# EAGLE board spi_lcd (EAGLE 6.1)
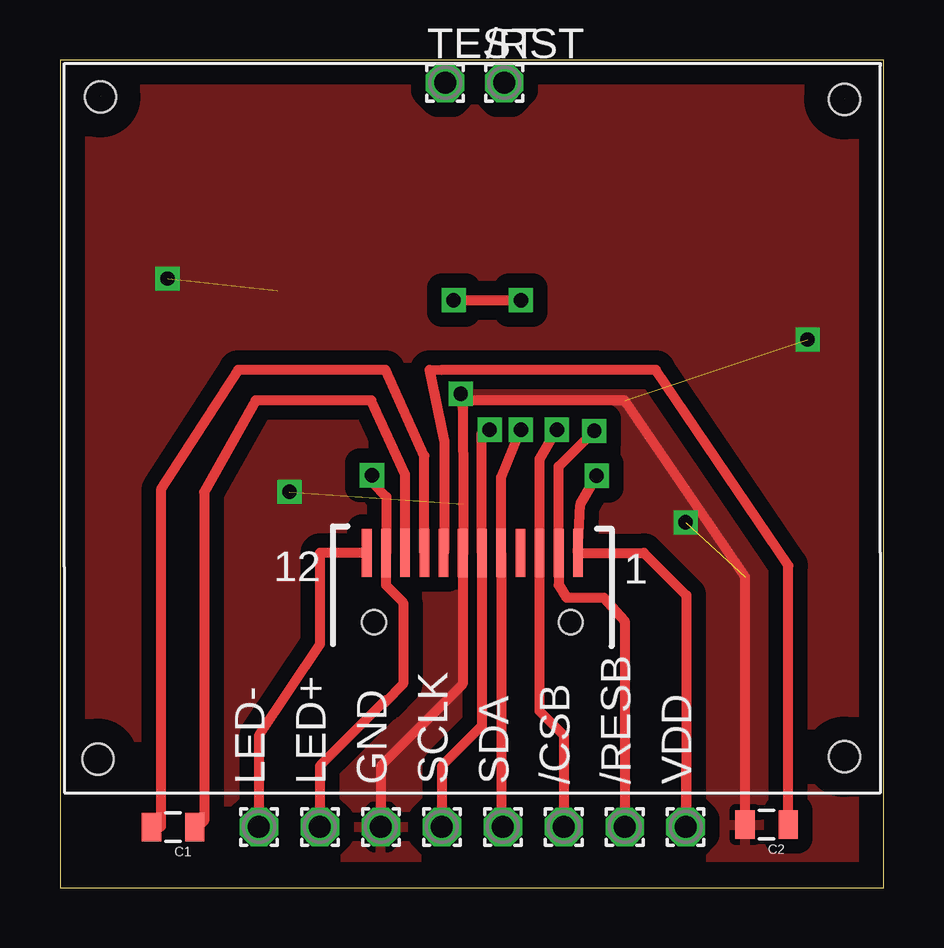
[diagram p0: board, top side]
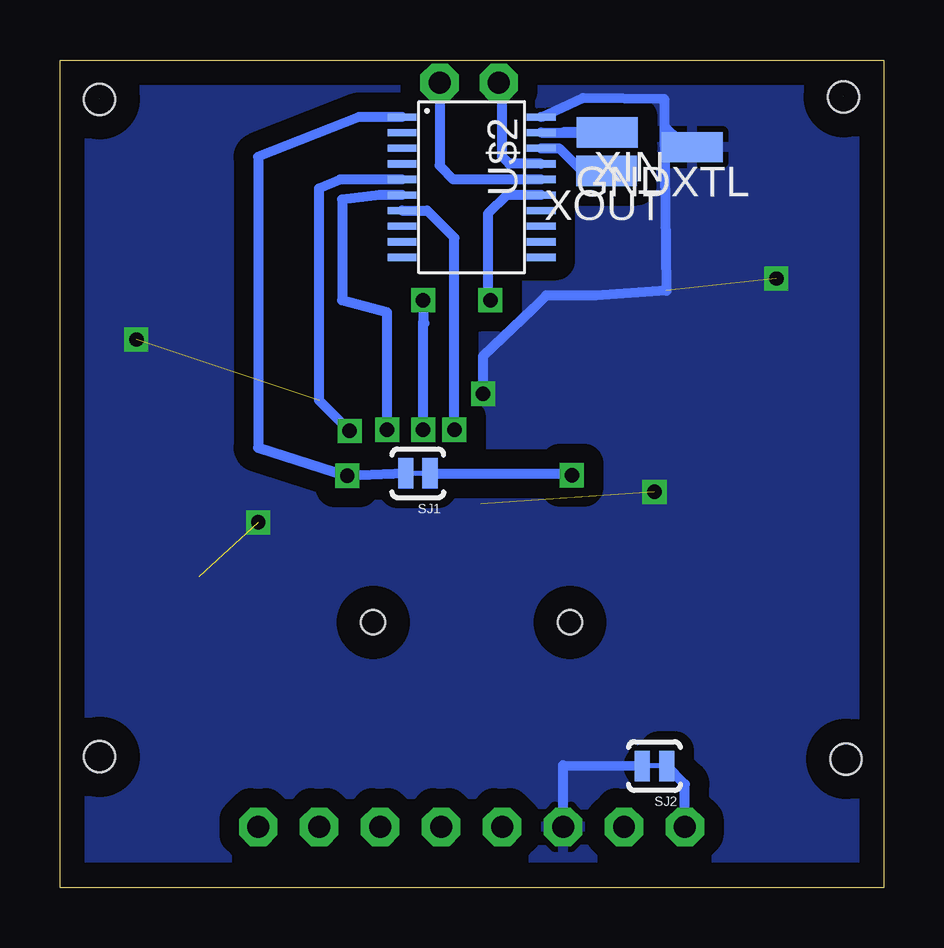
[diagram p1: board, bottom side, seen from below]

Size 34.33 x 34.52 mm. Coordinates in mm from the lower left corner, seen from the top.
Outline: 0,0 34.33,0 34.33,34.52 0,34.52 0,0
Copper layers (1*16): Top 0.035mm / dielectric 1.5mm / Bottom 0.035mm
Design rules: minimum track width 10mil, minimum drill 24mil, track to track 8mil, track to pad 8mil, pad to pad 8mil, via to via 8mil, smd to smd 8mil, copper to edge 40mil, drill to drill 8mil, minimum pad ring 10mil, minimum via ring 8mil, stop-mask expansion 4mil, vias tented up to drill 0mil, thermal gap 10mil
Holes 2.2 mm at -5.68,1.91 38.77,1.91

## Footprints (pad centres in the part's own frame; a part is rotated, then mirrored left to right if it is on the bottom)
1,6/0,9 = drill 0.914 pad 1.6 octagon: 1 0,0
0805 = smd 0.8 x 1.2: 1 -0.9,0; 2 0.9,0
SMD1,27-2,54 = smd 1.27 x 2.54: 1 0,0
SJ_2S-TRACE = smd 0.635 x 1.27: 1 -0.508,0; 2 0.508,0
PE9665WRF = smd 0.4 x 2: 1 4.4,0; 2 3.6,0; 3 2.8,0; 4 2,0; 5 1.2,0; 6 0.4,0; 7 -0.4,0; 8 -1.2,0; 9 -2,0; 10 -2.8,0; 11 -3.6,0; 12 -4.4,0 | hole 1: -4.1,-2.9; 4.1,-2.9 | hole 1.3: -15.5,19; 15.5,18.9; 15.5,-8.5; -15.6,-8.6
PW20 = smd 0.3 x 1.2: 1 -2.925,-2.9; 2 -2.275,-2.9; 3 -1.625,-2.9; 4 -0.975,-2.9; 5 -0.325,-2.9; 6 0.325,-2.9; 7 0.975,-2.9; 8 1.625,-2.9; 9 2.275,-2.9; 10 2.925,-2.9; 11 2.925,2.9; 12 2.275,2.9; 13 1.625,2.9; 14 0.975,2.9; 15 0.325,2.9; 16 -0.325,2.9; 17 -0.975,2.9; 18 -1.625,2.9; 19 -2.275,2.9; 20 -2.925,2.9

## Placement (x,y rotation side)
/CSB  [1,6/0,9]  20.99,2.54 0 top
/RESB  [1,6/0,9]  23.53,2.54 0 top
/RST  [1,6/0,9]  18.51,33.56 0 top
C1  [0805]  4.72,2.54 180 top
C2  [0805]  29.45,2.64 180 top
GND  [1,6/0,9]  13.37,2.54 0 top
GNDXTL  [SMD1,27-2,54]  7.99,30.88 90 bottom
LED+  [1,6/0,9]  10.83,2.54 0 top
LED-  [1,6/0,9]  8.29,2.54 0 top
SCLK  [1,6/0,9]  15.91,2.54 0 top
SDA  [1,6/0,9]  18.45,2.54 0 top
SJ1  SOLDERJUMPERTRACE  [SJ_2S-TRACE]  19.42,17.28 180 bottom
SJ2  SOLDERJUMPERTRACE  [SJ_2S-TRACE]  9.56,5.08 180 bottom
TEST  [1,6/0,9]  16.05,33.56 0 top
U$1  PE9665WRFPE9665WRF-WHOLE  [PE9665WRF]  17.18,13.97 0 top
U$2  G2XX3---PW20  [PW20]  17.18,29.21 270 bottom
VDD  [1,6/0,9]  26.07,2.54 0 top
XIN  [SMD1,27-2,54]  11.52,31.5 90 bottom
XOUT  [SMD1,27-2,54]  11.56,29.9 90 bottom

## Library data of the parts
/CSB /RESB /RST GND GNDXTL LED+ LED- SCLK SDA TEST VDD XIN XOUT = wirepad
C1 C2 SJ1 SJ2 = SparkFun-Passives
U$1 = apus-spidisplay
U$2 = TI_MSP430_v16

## Nets
C2: C2.1 U$1.8
GND: C2.2 GND.1 GNDXTL.1 SJ2.2 U$1.7 U$2.20
N$1: C1.1 U$1.10
N$2: C1.2 U$1.9
N$3: U$2.19 XIN.1
N$4: LED+.1 SJ1.1 U$1.11
N$5: LED-.1 SJ2.1 U$1.12
N$6: U$2.18 XOUT.1
N$7: SCLK.1 U$1.6 U$2.7
N$8: SDA.1 U$1.5 U$2.15
N$9: /CSB.1 U$1.3 U$2.6
N$10: /RESB.1 U$1.2 U$2.5
N$11: TEST.1 U$2.17
N$12: /RST.1 U$2.16
N$13: U$2.2
VDD: SJ1.2 U$1.1 U$2.1 VDD.1

## Tracks (layer width: path | path; a pad name or v marks a point on that pad's centre or on a via)
C2
  Top 0.406: C2.1 30.34,13.44 24.83,21.59 15.91,21.59 15.4,21.6 16,18.7 16.01,18.69 16.01,14.04 U$1.8
GND  (via drill 0.6)  (4 unrouted)
  Top 0.406: GND.1 13.37,5.08 16.78,8.49 U$1.7 16.81,14 16.8,13.9 16.8,16 16.78,20.32 | C2.2 28.54,12.96 23.53,20.32 16.78,20.32 | 16.78,20.32 v16.7,20.6
  Bottom 0.406: GND.1 13.37,5.12 SJ2.2 | v16.7,20.6 16.7,22.17 14.64,24.13 14.07,24.7 12,24.7 9.06,24.9 9.15,31.75 | U$2.20 12.54,32.94 9.16,32.9 9.15,31.75 | GNDXTL.1 8.49,31.1 9.15,31.75
  other vias: 26.07,15.24 4.48,25.4 9.56,16.51 31.15,22.86
  pour Top (isolate 0.61): 0.67,34.29 33.69,34.29 33.69,1.27 0.67,1.27
  pour Bottom (isolate 0.813): 0.67,34.29 33.69,34.29 33.69,1.27 0.67,1.27
N$1
  Top 0.406: U$1.10 14.38,17.24 12.97,20.32 8.15,20.32 6,16.5 6,2.79 5.75,2.54 C1.1
N$2
  Top 0.406: U$1.9 15.18,18.01 13.57,21.59 7.42,21.59 4.2,16.6 4.2,2.56 C1.2
N$3
  Bottom 0.406: U$2.19 13.37,31.48 | 13.37,31.48 10.83,31.48 10.83,31.75 | XIN.1 13.37,31.5 13.37,31.48
N$4  (via drill 0.6)
  Top 0.406: 13.58,7.83 13.47,7.72 | 13.47,7.72 10.83,5.08 LED+.1 | 13.47,7.72 13.5,7.7 14.3,8.5 14.3,11.9 13.58,12.62 U$1.11 13.6,13.99 13.6,16.3 13,16.9 v13,17.2
  Bottom 0.406: SJ1.1 13.08,17.28 v13,17.2
N$5
  Top 0.406: U$1.12 10.83,13.97 10.83,10.16 8.29,6.35 LED-.1
  Bottom 0.406: LED-.1 8.29,4.32 SJ2.1
N$6
  Bottom 0.406: U$2.18 13.54,30.84 12.6,29.9 XOUT.1
N$7  (via drill 0.6)
  Top 0.406: SCLK.1 15.91,5.08 17.58,6.75 U$1.6 17.58,18.98 v17.9,19.1
  Bottom 0.406: v17.9,19.1 17.9,27.1 19.04,28.23 U$2.7
N$8  (via drill 0.6)
  Top 0.406: SDA.1 18.38,2.61 U$1.5 18.38,17.11 v19.2,19.1 | v16.4,24.5 v19.2,24.5
  Bottom 0.406: v19.2,19.1 19.2,23.58 | 19.2,23.58 19.15,23.53 | U$2.15 15.72,28.89 16.5,28.1 16.5,24.6 v16.4,24.5 | v19.2,24.5 19.2,23.58
N$9  (via drill 0.6)
  Top 0.406: /CSB.1 20.99,6.35 19.98,7.36 U$1.3 19.98,17.88 v20.7,19.1
  Bottom 0.406: v20.7,19.1 20.7,24 22.57,24.5 22.57,28.7 21.01,28.89 U$2.6
N$10  (via drill 0.6)
  Top 0.406: /RESB.1 23.53,11.13 22.66,12.1 21.1,12.1 20.78,12.62 U$1.2 20.78,17.57 v22.26,19.05
  Bottom 0.406: U$2.5 22.66,29.54 23.53,29.17 23.53,20.32 v22.26,19.05
N$11
  Bottom 0.406: U$2.17 15.62,30.18 15.91,30.48 15.91,33.41 16.1,33.6 16.09,33.6 TEST.1
N$12
  Bottom 0.406: /RST.1 18.51,30.11 17.93,29.54 U$2.16
N$14  (1 unrouted)
N$15  (1 unrouted)
N$19
  pour Bottom (isolate 1.016): 7.02,33.02 7.02,34.29
VDD  (via drill 0.6)
  Top 0.406: 26.07,5.08 VDD.1 26.1,2.57 26.1,12.2 24.33,13.97 U$1.1 21.68,15.99 v22.36,17.18
  Bottom 0.406: SJ1.2 v22.36,17.18 26.07,18.35 26.07,30.48 21.88,32.13 U$2.1